# EAGLE board lipo_warn_multi (EAGLE 6.3)
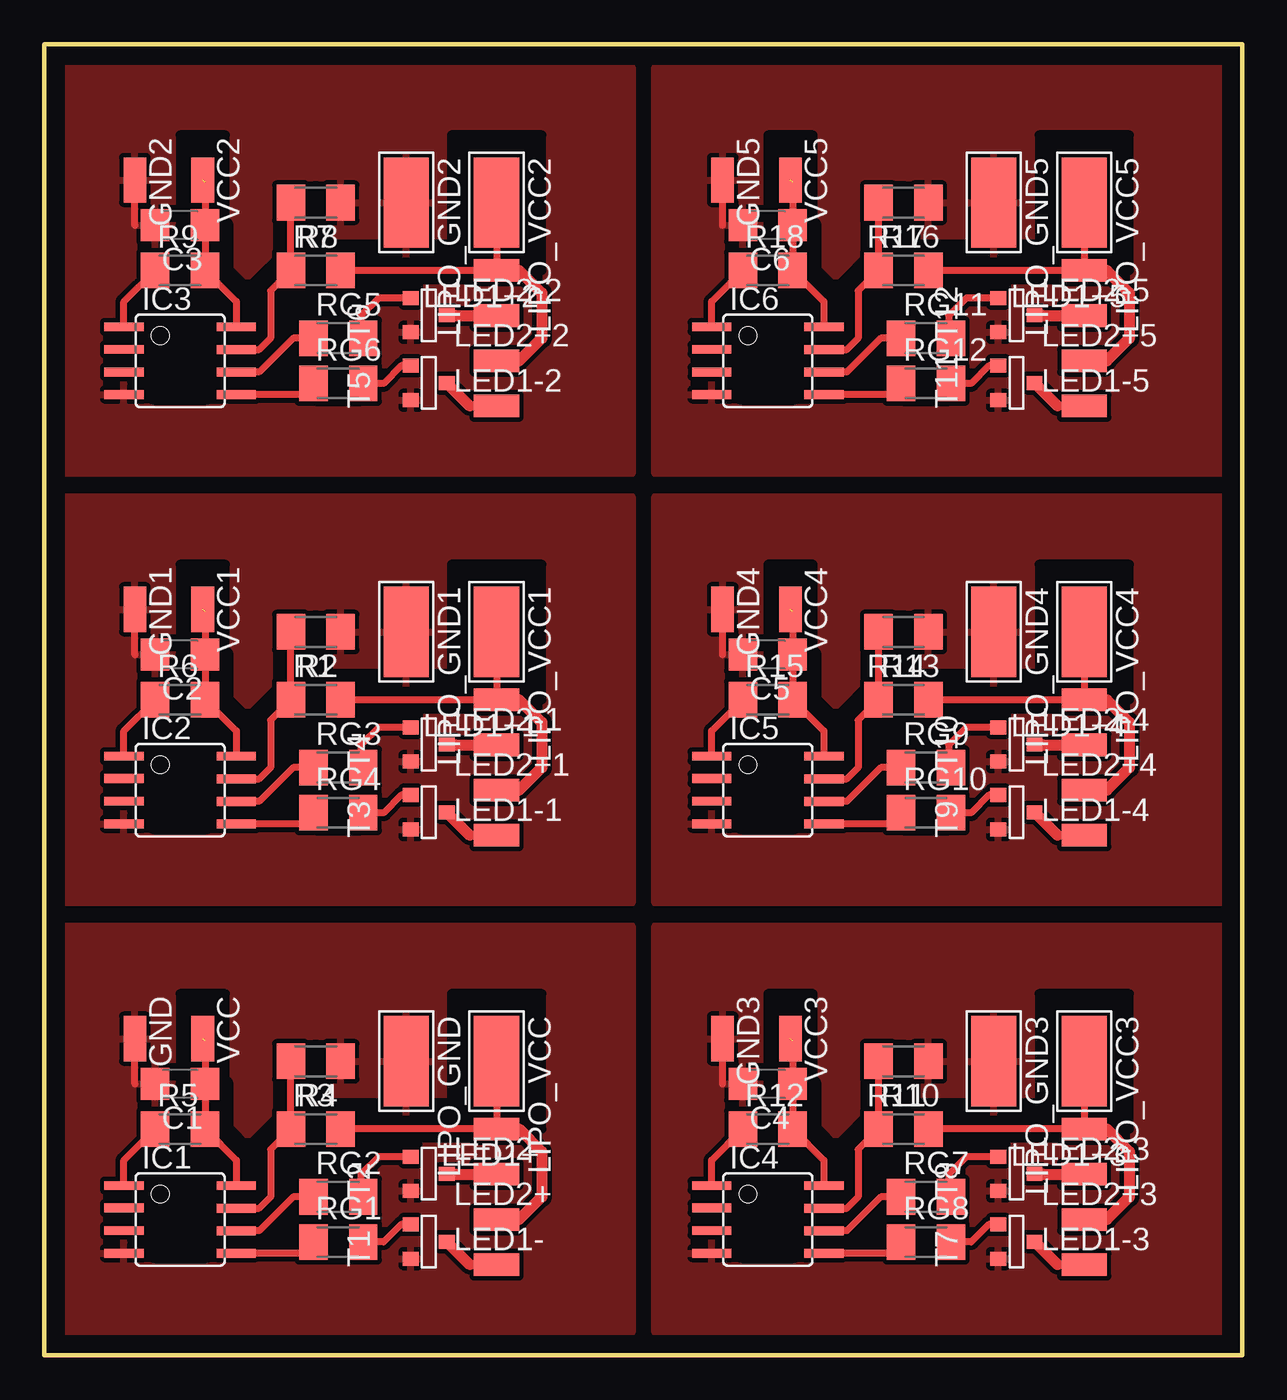
[diagram p0: board, top side]

Size 67.31 x 73.66 mm. Coordinates in mm from the lower left corner, seen from the top.
Outline: 0,0 0,73.66 67.31,73.66 67.31,0 0,0
Copper layers (1*16): Top 0.035mm / dielectric 1.5mm / Bottom 0.035mm
Design rules "default": minimum track width 10mil, minimum drill 24mil, track to track 8mil, track to pad 8mil, pad to pad 8mil, via to via 8mil, smd to smd 8mil, copper to edge 40mil, drill to drill 8mil, minimum pad ring 10mil, minimum via ring 8mil, stop-mask expansion 4mil, vias tented up to drill 0mil, thermal gap 10mil
tRestrict: area 7.6,15.2 to 10.2,20.3; area 22.9,12.7 to 27.9,20.3; area 7.6,39.4 to 10.2,44.5; area 22.9,36.8 to 27.9,44.5; area 7.6,63.5 to 10.2,68.6; area 22.9,61 to 27.9,68.6; area 40.6,15.2 to 43.2,20.3; area 55.9,12.7 to 61,20.3; area 40.6,39.4 to 43.2,44.5; area 55.9,36.8 to 61,44.5; area 40.6,63.5 to 43.2,68.6; area 55.9,61 to 61,68.6; 102 lines

## Footprints (pad centres in the part's own frame; a part is rotated, then mirrored left to right if it is on the bottom)
C1206 = smd 1.6 x 1.8: 1 -1.4,0; 2 1.4,0
SMD1,27-2,54 = smd 1.27 x 2.54: 1 0,0
SOIC8 = smd 0.5 x 2.2: 1 -1.905,-3.154; 2 -0.645,-3.154; 3 0.625,-3.154; 4 1.895,-3.154; 5 1.905,3.154; 6 0.635,3.154; 7 -0.635,3.154; 8 -1.905,3.154
5-2,5 = smd 2.54 x 5.08: 1 0,0
M1206 = smd 1.6 x 2: 1 -1.4,0; 2 1.4,0
SOT-23 = smd 0.787 x 0.889: 1 0.025,-1.016; 2 -0.94,1.016; 3 0.991,1.016

## Placement (x,y rotation side)
C1  100nF  [C1206]  7.62,15.24 180 top
C2  100nF  [C1206]  7.62,39.37 180 top
C3  100nF  [C1206]  7.62,63.5 180 top
C4  100nF  [C1206]  40.64,15.24 180 top
C5  100nF  [C1206]  40.64,39.37 180 top
C6  100nF  [C1206]  40.64,63.5 180 top
GND  [SMD1,27-2,54]  5.08,17.78 180 top
GND1  [SMD1,27-2,54]  5.08,41.91 180 top
GND2  [SMD1,27-2,54]  5.08,66.04 180 top
GND3  [SMD1,27-2,54]  38.1,17.78 180 top
GND4  [SMD1,27-2,54]  38.1,41.91 180 top
GND5  [SMD1,27-2,54]  38.1,66.04 180 top
IC1  ATTINY13-20SU  [SOIC8]  7.62,7.62 270 top
IC2  ATTINY13-20SU  [SOIC8]  7.62,31.75 270 top
IC3  ATTINY13-20SU  [SOIC8]  7.62,55.88 270 top
IC4  ATTINY13-20SU  [SOIC8]  40.64,7.62 270 top
IC5  ATTINY13-20SU  [SOIC8]  40.64,31.75 270 top
IC6  ATTINY13-20SU  [SOIC8]  40.64,55.88 270 top
LED1+  WIREPADSMD1,27-254  [SMD1,27-2,54]  25.4,12.7 90 top
LED1+1  WIREPADSMD1,27-254  [SMD1,27-2,54]  25.4,36.83 90 top
LED1+2  WIREPADSMD1,27-254  [SMD1,27-2,54]  25.4,60.96 90 top
LED1+3  WIREPADSMD1,27-254  [SMD1,27-2,54]  58.42,12.7 90 top
LED1+4  WIREPADSMD1,27-254  [SMD1,27-2,54]  58.42,36.83 90 top
LED1+5  WIREPADSMD1,27-254  [SMD1,27-2,54]  58.42,60.96 90 top
LED1-  WIREPADSMD1,27-254  [SMD1,27-2,54]  25.4,5.08 270 top
LED1-1  WIREPADSMD1,27-254  [SMD1,27-2,54]  25.4,29.21 270 top
LED1-2  WIREPADSMD1,27-254  [SMD1,27-2,54]  25.4,53.34 270 top
LED1-3  WIREPADSMD1,27-254  [SMD1,27-2,54]  58.42,5.08 270 top
LED1-4  WIREPADSMD1,27-254  [SMD1,27-2,54]  58.42,29.21 270 top
LED1-5  WIREPADSMD1,27-254  [SMD1,27-2,54]  58.42,53.34 270 top
LED2+  WIREPADSMD1,27-254  [SMD1,27-2,54]  25.4,7.62 270 top
LED2+1  WIREPADSMD1,27-254  [SMD1,27-2,54]  25.4,31.75 270 top
LED2+2  WIREPADSMD1,27-254  [SMD1,27-2,54]  25.4,55.88 270 top
LED2+3  WIREPADSMD1,27-254  [SMD1,27-2,54]  58.42,7.62 270 top
LED2+4  WIREPADSMD1,27-254  [SMD1,27-2,54]  58.42,31.75 270 top
LED2+5  WIREPADSMD1,27-254  [SMD1,27-2,54]  58.42,55.88 270 top
LED2-  WIREPADSMD1,27-254  [SMD1,27-2,54]  25.4,10.16 270 top
LED2-1  WIREPADSMD1,27-254  [SMD1,27-2,54]  25.4,34.29 270 top
LED2-2  WIREPADSMD1,27-254  [SMD1,27-2,54]  25.4,58.42 270 top
LED2-3  WIREPADSMD1,27-254  [SMD1,27-2,54]  58.42,10.16 270 top
LED2-4  WIREPADSMD1,27-254  [SMD1,27-2,54]  58.42,34.29 270 top
LED2-5  WIREPADSMD1,27-254  [SMD1,27-2,54]  58.42,58.42 270 top
LIPO_GND  WIREPADSMD5-2,5  [5-2,5]  20.32,16.51 180 top
LIPO_GND1  WIREPADSMD5-2,5  [5-2,5]  20.32,40.64 180 top
LIPO_GND2  WIREPADSMD5-2,5  [5-2,5]  20.32,64.77 180 top
LIPO_GND3  WIREPADSMD5-2,5  [5-2,5]  53.34,16.51 180 top
LIPO_GND4  WIREPADSMD5-2,5  [5-2,5]  53.34,40.64 180 top
LIPO_GND5  WIREPADSMD5-2,5  [5-2,5]  53.34,64.77 180 top
LIPO_VCC  WIREPADSMD5-2,5  [5-2,5]  25.4,16.51 180 top
LIPO_VCC1  WIREPADSMD5-2,5  [5-2,5]  25.4,40.64 180 top
LIPO_VCC2  WIREPADSMD5-2,5  [5-2,5]  25.4,64.77 180 top
LIPO_VCC3  WIREPADSMD5-2,5  [5-2,5]  58.42,16.51 180 top
LIPO_VCC4  WIREPADSMD5-2,5  [5-2,5]  58.42,40.64 180 top
LIPO_VCC5  WIREPADSMD5-2,5  [5-2,5]  58.42,64.77 180 top
R1  130K  [M1206]  15.24,36.83 0 top
R2  12K  [M1206]  15.24,40.64 180 top
R3  130K  [M1206]  15.24,12.7 0 top
R4  12K  [M1206]  15.24,16.51 180 top
R5  10k  [M1206]  7.62,12.7 0 top
R6  10k  [M1206]  7.62,36.83 0 top
R7  130K  [M1206]  15.24,60.96 0 top
R8  12K  [M1206]  15.24,64.77 180 top
R9  10k  [M1206]  7.62,60.96 0 top
R10  130K  [M1206]  48.26,12.7 0 top
R11  12K  [M1206]  48.26,16.51 180 top
R12  10k  [M1206]  40.64,12.7 0 top
R13  130K  [M1206]  48.26,36.83 0 top
R14  12K  [M1206]  48.26,40.64 180 top
R15  10k  [M1206]  40.64,36.83 0 top
R16  130K  [M1206]  48.26,60.96 0 top
R17  12K  [M1206]  48.26,64.77 180 top
R18  10k  [M1206]  40.64,60.96 0 top
RG1  270  [M1206]  16.51,6.35 0 top
RG2  270  [M1206]  16.51,8.89 0 top
RG3  270  [M1206]  16.51,33.02 0 top
RG4  270  [M1206]  16.51,30.48 0 top
RG5  270  [M1206]  16.51,57.15 0 top
RG6  270  [M1206]  16.51,54.61 0 top
RG7  270  [M1206]  49.53,8.89 0 top
RG8  270  [M1206]  49.53,6.35 0 top
RG9  270  [M1206]  49.53,33.02 0 top
RG10  270  [M1206]  49.53,30.48 0 top
RG11  270  [M1206]  49.53,57.15 0 top
RG12  270  [M1206]  49.53,54.61 0 top
T1  IRLML 2244  [SOT-23]  21.59,6.35 90 top
T2  IRLML 2244  [SOT-23]  21.59,10.16 90 top
T3  IRLML 2244  [SOT-23]  21.59,30.48 90 top
T4  IRLML 2244  [SOT-23]  21.59,34.29 90 top
T5  IRLML 2244  [SOT-23]  21.59,54.61 90 top
T6  IRLML 2244  [SOT-23]  21.59,58.42 90 top
T7  IRLML 2244  [SOT-23]  54.61,6.35 90 top
T8  IRLML 2244  [SOT-23]  54.61,10.16 90 top
T9  IRLML 2244  [SOT-23]  54.61,30.48 90 top
T10  IRLML 2244  [SOT-23]  54.61,34.29 90 top
T11  IRLML 2244  [SOT-23]  54.61,54.61 90 top
T12  IRLML 2244  [SOT-23]  54.61,58.42 90 top
VCC  [SMD1,27-2,54]  8.89,17.78 180 top
VCC1  [SMD1,27-2,54]  8.89,41.91 180 top
VCC2  [SMD1,27-2,54]  8.89,66.04 180 top
VCC3  [SMD1,27-2,54]  41.91,17.78 180 top
VCC4  [SMD1,27-2,54]  41.91,41.91 180 top
VCC5  [SMD1,27-2,54]  41.91,66.04 180 top

## Library data of the parts
C1-C6 R1-R18 RG1-RG12 = rcl
GND GND1-GND5 LED1+ LED1+1-LED1+5 LED1- LED1-1-LED1-5 LED2+ LED2+1-LED2+5 LED2- LED2-1-LED2-5 LIPO_GND LIPO_GND1-LIPO_GND5 LIPO_VCC LIPO_VCC1-LIPO_VCC5 VCC VCC1-VCC5 = wirepad
IC1-IC6 = attiny13
T1-T12 = msop8; OC_FARNELL: unknown; OC_NEWARK: unknown

## Nets
GND: C1.2 GND.1 IC1.4 LIPO_GND.1 R4.1 T1.2 T2.2
GND1: C2.2 GND1.1 IC2.4 LIPO_GND1.1 R2.1 T3.2 T4.2
GND2: C3.2 GND2.1 IC3.4 LIPO_GND2.1 R8.1 T5.2 T6.2
GND3: C4.2 GND3.1 IC4.4 LIPO_GND3.1 R11.1 T7.2 T8.2
GND4: C5.2 GND4.1 IC5.4 LIPO_GND4.1 R14.1 T9.2 T10.2
GND5: C6.2 GND5.1 IC6.4 LIPO_GND5.1 R17.1 T11.2 T12.2
LIPO_VCC: LED1+.1 LED2+.1
LIPO_VCC1: LED1+1.1 LED2+1.1
LIPO_VCC2: LED1+2.1 LED2+2.1
LIPO_VCC3: LED1+3.1 LED2+3.1
LIPO_VCC4: LED1+4.1 LED2+4.1
LIPO_VCC5: LED1+5.1 LED2+5.1
N$1: IC1.1 R5.1
N$2: IC1.5 RG1.1
N$3: IC1.6 RG2.1
N$4: IC1.7 R3.1 R4.2
N$5: LIPO_VCC.1 R3.2
N$6: IC2.1 R6.1
N$7: LED1-.1 T1.1
N$8: RG1.2 T1.3
N$9: RG2.2 T2.3
N$10: LED2-.1 T2.1
N$11: IC2.5 RG4.1
N$12: IC2.6 RG3.1
N$13: IC2.7 R1.1 R2.2
N$14: RG4.2 T3.3
N$15: RG3.2 T4.3
N$16: LED1-1.1 T3.1
N$17: LED2-1.1 T4.1
N$18: LIPO_VCC1.1 R1.2
N$19: IC3.1 R9.1
N$20: IC3.5 RG6.1
N$21: IC3.6 RG5.1
N$22: IC3.7 R7.1 R8.2
N$23: RG6.2 T5.3
N$24: RG5.2 T6.3
N$25: LED1-2.1 T5.1
N$26: LED2-2.1 T6.1
N$27: LIPO_VCC2.1 R7.2
N$28: IC4.1 R12.1
N$29: IC4.5 RG8.1
N$30: IC4.6 RG7.1
N$31: IC4.7 R10.1 R11.2
N$32: RG8.2 T7.3
N$33: RG7.2 T8.3
N$34: LED1-3.1 T7.1
N$35: LED2-3.1 T8.1
N$36: LIPO_VCC3.1 R10.2
N$37: IC5.1 R15.1
N$38: IC5.5 RG10.1
N$39: IC5.6 RG9.1
N$40: IC5.7 R13.1 R14.2
N$41: RG10.2 T9.3
N$42: RG9.2 T10.3
N$43: LED1-4.1 T9.1
N$44: LED2-4.1 T10.1
N$45: LIPO_VCC4.1 R13.2
N$46: IC6.1 R18.1
N$47: IC6.5 RG12.1
N$48: IC6.6 RG11.1
N$49: IC6.7 R16.1 R17.2
N$50: RG12.2 T11.3
N$51: RG11.2 T12.3
N$52: LED1-5.1 T11.1
N$53: LED2-5.1 T12.1
N$54: LIPO_VCC5.1 R16.2
VCC: C1.1 IC1.8 R5.2 VCC.1
VCC1: C2.1 IC2.8 R6.2 VCC1.1
VCC2: C3.1 IC3.8 R9.2 VCC2.1
VCC3: C4.1 IC4.8 R12.2 VCC3.1
VCC4: C5.1 IC5.8 R15.2 VCC4.1
VCC5: C6.1 IC6.8 R18.2 VCC5.1

## Tracks (layer width: path | path; a pad name or v marks a point on that pad's centre or on a via)
GND
  Top 0.406: C1.2 6.35,15.24 | 5.08,15.24 GND.1
  pour Top (isolate 0.254): 1.27,24.13 33.02,24.13 33.02,1.27 1.27,1.27
GND1
  Top 0.406: C2.2 6.35,39.37 | 5.08,39.37 GND1.1
  pour Top (isolate 0.254): 1.27,48.26 33.02,48.26 33.02,25.4 1.27,25.4
GND2
  Top 0.406: C3.2 6.35,63.5 | 5.08,63.5 GND2.1
  pour Top (isolate 0.254): 1.27,72.39 33.02,72.39 33.02,49.53 1.27,49.53
GND3
  Top 0.406: C4.2 39.37,15.24 | 38.1,15.24 GND3.1
  pour Top (isolate 0.254): 34.29,24.13 66.04,24.13 66.04,1.27 34.29,1.27
GND4
  Top 0.406: C5.2 39.37,39.37 | 38.1,39.37 GND4.1
  pour Top (isolate 0.254): 34.29,48.26 66.04,48.26 66.04,25.4 34.29,25.4
GND5
  Top 0.406: C6.2 39.37,63.5 | 38.1,63.5 GND5.1
  pour Top (isolate 0.254): 34.29,72.39 66.04,72.39 66.04,49.53 34.29,49.53
LIPO_VCC
  Top 0.406: LED1+.1 26.67,12.7 | 26.67,7.62 LED2+.1
  Top 0.61: 26.67,12.7 27.94,11.43 27.94,8.89 26.67,7.62
LIPO_VCC1
  Top 0.406: LED1+1.1 26.67,36.83 | 26.67,31.75 LED2+1.1
  Top 0.61: 26.67,36.83 27.94,35.56 27.94,33.02 26.67,31.75
LIPO_VCC2
  Top 0.406: LED1+2.1 26.67,60.96 | 26.67,55.88 LED2+2.1
  Top 0.61: 26.67,60.96 27.94,59.69 27.94,57.15 26.67,55.88
LIPO_VCC3
  Top 0.406: LED1+3.1 59.69,12.7 | 59.69,7.62 LED2+3.1
  Top 0.61: 59.69,12.7 60.96,11.43 60.96,8.89 59.69,7.62
LIPO_VCC4
  Top 0.406: LED1+4.1 59.69,36.83 | 59.69,31.75 LED2+4.1
  Top 0.61: 59.69,36.83 60.96,35.56 60.96,33.02 59.69,31.75
LIPO_VCC5
  Top 0.406: LED1+5.1 59.69,60.96 | 59.69,55.88 LED2+5.1
  Top 0.61: 59.69,60.96 60.96,59.69 60.96,57.15 59.69,55.88
N$1
  Top 0.406: IC1.1 4.47,10.95 R5.1
N$2
  Top 0.406: RG1.1 14.47,5.71 IC1.5
N$3
  Top 0.406: RG2.1 13.97,8.89 12.06,6.99 IC1.6
N$4
  Top 0.406: R4.2 R3.1 12.7,11.56 12.7,8.89 12.06,8.26 IC1.7
N$5
  Top 0.406: LIPO_VCC.1 25.4,12.7 R3.2
N$6
  Top 0.406: IC2.1 4.47,35.08 R6.1
N$7
  Top 0.406: 23.9,5.08 LED1-.1
  Top 0.61: T1.1 23.9,5.08
N$8
  Top 0.406: T1.3 20.04,7.34 19.05,6.35 RG1.2
  Top 0.813: RG1.2 17.78,6.35
N$9
  Top 0.406: T2.3 18.77,11.15 17.78,10.16 17.78,9.02 RG2.2
N$10
  Top 0.61: T2.1 23.09,10.16 LED2-.1
N$11
  Top 0.406: RG4.1 14.47,29.84 IC2.5
N$12
  Top 0.406: RG3.1 13.97,33.02 12.06,31.11 IC2.6
N$13
  Top 0.406: R2.2 R1.1 12.7,35.69 12.7,33.02 12.06,32.38 IC2.7
N$14
  Top 0.406: T3.3 20.04,31.47 19.05,30.48 RG4.2
  Top 0.813: RG4.2 17.78,30.48
N$15
  Top 0.406: T4.3 18.77,35.28 17.78,34.29 17.78,33.15 RG3.2
N$16
  Top 0.406: 23.9,29.21 LED1-1.1
  Top 0.61: T3.1 23.9,29.21
N$17
  Top 0.61: T4.1 23.09,34.29 LED2-1.1
N$18
  Top 0.406: LIPO_VCC1.1 25.4,36.83 R1.2
N$19
  Top 0.406: IC3.1 4.47,59.21 R9.1
N$20
  Top 0.406: RG6.1 14.47,53.98 IC3.5
N$21
  Top 0.406: RG5.1 13.97,57.15 12.06,55.24 IC3.6
N$22
  Top 0.406: R8.2 R7.1 12.7,59.82 12.7,57.15 12.06,56.52 IC3.7
N$23
  Top 0.406: T5.3 20.04,55.6 19.05,54.61 RG6.2
  Top 0.813: RG6.2 17.78,54.61
N$24
  Top 0.406: T6.3 18.77,59.41 17.78,58.42 17.78,57.28 RG5.2
N$25
  Top 0.406: 23.9,53.34 LED1-2.1
  Top 0.61: T5.1 23.9,53.34
N$26
  Top 0.61: T6.1 23.09,58.42 LED2-2.1
N$27
  Top 0.406: LIPO_VCC2.1 25.4,60.96 R7.2
N$28
  Top 0.406: IC4.1 37.49,10.95 R12.1
N$29
  Top 0.406: RG8.1 47.49,5.71 IC4.5
N$30
  Top 0.406: RG7.1 46.99,8.89 45.09,6.99 IC4.6
N$31
  Top 0.406: R11.2 R10.1 45.72,11.56 45.72,8.89 45.09,8.26 IC4.7
N$32
  Top 0.406: T7.3 53.06,7.34 52.07,6.35 RG8.2
  Top 0.813: RG8.2 50.8,6.35
N$33
  Top 0.406: T8.3 51.79,11.15 50.8,10.16 50.8,9.02 RG7.2
N$34
  Top 0.406: 56.92,5.08 LED1-3.1
  Top 0.61: T7.1 56.92,5.08
N$35
  Top 0.61: T8.1 56.11,10.16 LED2-3.1
N$36
  Top 0.406: LIPO_VCC3.1 58.42,12.7 R10.2
N$37
  Top 0.406: IC5.1 37.49,35.08 R15.1
N$38
  Top 0.406: RG10.1 47.49,29.84 IC5.5
N$39
  Top 0.406: RG9.1 46.99,33.02 45.09,31.11 IC5.6
N$40
  Top 0.406: R14.2 R13.1 45.72,35.69 45.72,33.02 45.09,32.38 IC5.7
N$41
  Top 0.406: T9.3 53.06,31.47 52.07,30.48 RG10.2
  Top 0.813: RG10.2 50.8,30.48
N$42
  Top 0.406: T10.3 51.79,35.28 50.8,34.29 50.8,33.15 RG9.2
N$43
  Top 0.406: 56.92,29.21 LED1-4.1
  Top 0.61: T9.1 56.92,29.21
N$44
  Top 0.61: T10.1 56.11,34.29 LED2-4.1
N$45
  Top 0.406: LIPO_VCC4.1 58.42,36.83 R13.2
N$46
  Top 0.406: IC6.1 37.49,59.21 R18.1
N$47
  Top 0.406: RG12.1 47.49,53.98 IC6.5
N$48
  Top 0.406: RG11.1 46.99,57.15 45.09,55.24 IC6.6
N$49
  Top 0.406: R17.2 R16.1 45.72,59.82 45.72,57.15 45.09,56.52 IC6.7
N$50
  Top 0.406: T11.3 53.06,55.6 52.07,54.61 RG12.2
  Top 0.813: RG12.2 50.8,54.61
N$51
  Top 0.406: T12.3 51.79,59.41 50.8,58.42 50.8,57.28 RG11.2
N$52
  Top 0.406: 56.92,53.34 LED1-5.1
  Top 0.61: T11.1 56.92,53.34
N$53
  Top 0.61: T12.1 56.11,58.42 LED2-5.1
N$54
  Top 0.406: LIPO_VCC5.1 58.42,60.96 R16.2
VCC  (1 unrouted)
  Top 0.406: 9.02,17.65 C1.1 R5.2 10.77,10.95 IC1.8
VCC1  (1 unrouted)
  Top 0.406: 9.02,41.78 C2.1 R6.2 10.77,35.08 IC2.8
VCC2  (1 unrouted)
  Top 0.406: 9.02,65.91 C3.1 R9.2 10.77,59.21 IC3.8
VCC3  (1 unrouted)
  Top 0.406: 42.04,17.65 C4.1 R12.2 43.79,10.95 IC4.8
VCC4  (1 unrouted)
  Top 0.406: 42.04,41.78 C5.1 R15.2 43.79,35.08 IC5.8
VCC5  (1 unrouted)
  Top 0.406: 42.04,65.91 C6.1 R18.2 43.79,59.21 IC6.8

## Text on the board
tRestrict: Samuel Munz DHBW-Stuttg. V0.1 | Samuel Munz DHBW-Stuttg. V0.1 | Samuel Munz DHBW-Stuttg. V0.1 | Samuel Munz DHBW-Stuttg. V0.1 | Samuel Munz DHBW-Stuttg. V0.1 | Samuel Munz DHBW-Stuttg. V0.1